# Altium PCB 上层（4层）.pcbdoc
Units mm, origin at the board's own origin, x right, y up, seen from the top; angles counter-clockwise.
Board outline 45.7 x 65.4 mm, 2 copper layers (Top Layer, Bottom Layer); 50 components, 65 nets, 244 pads, 114 vias.
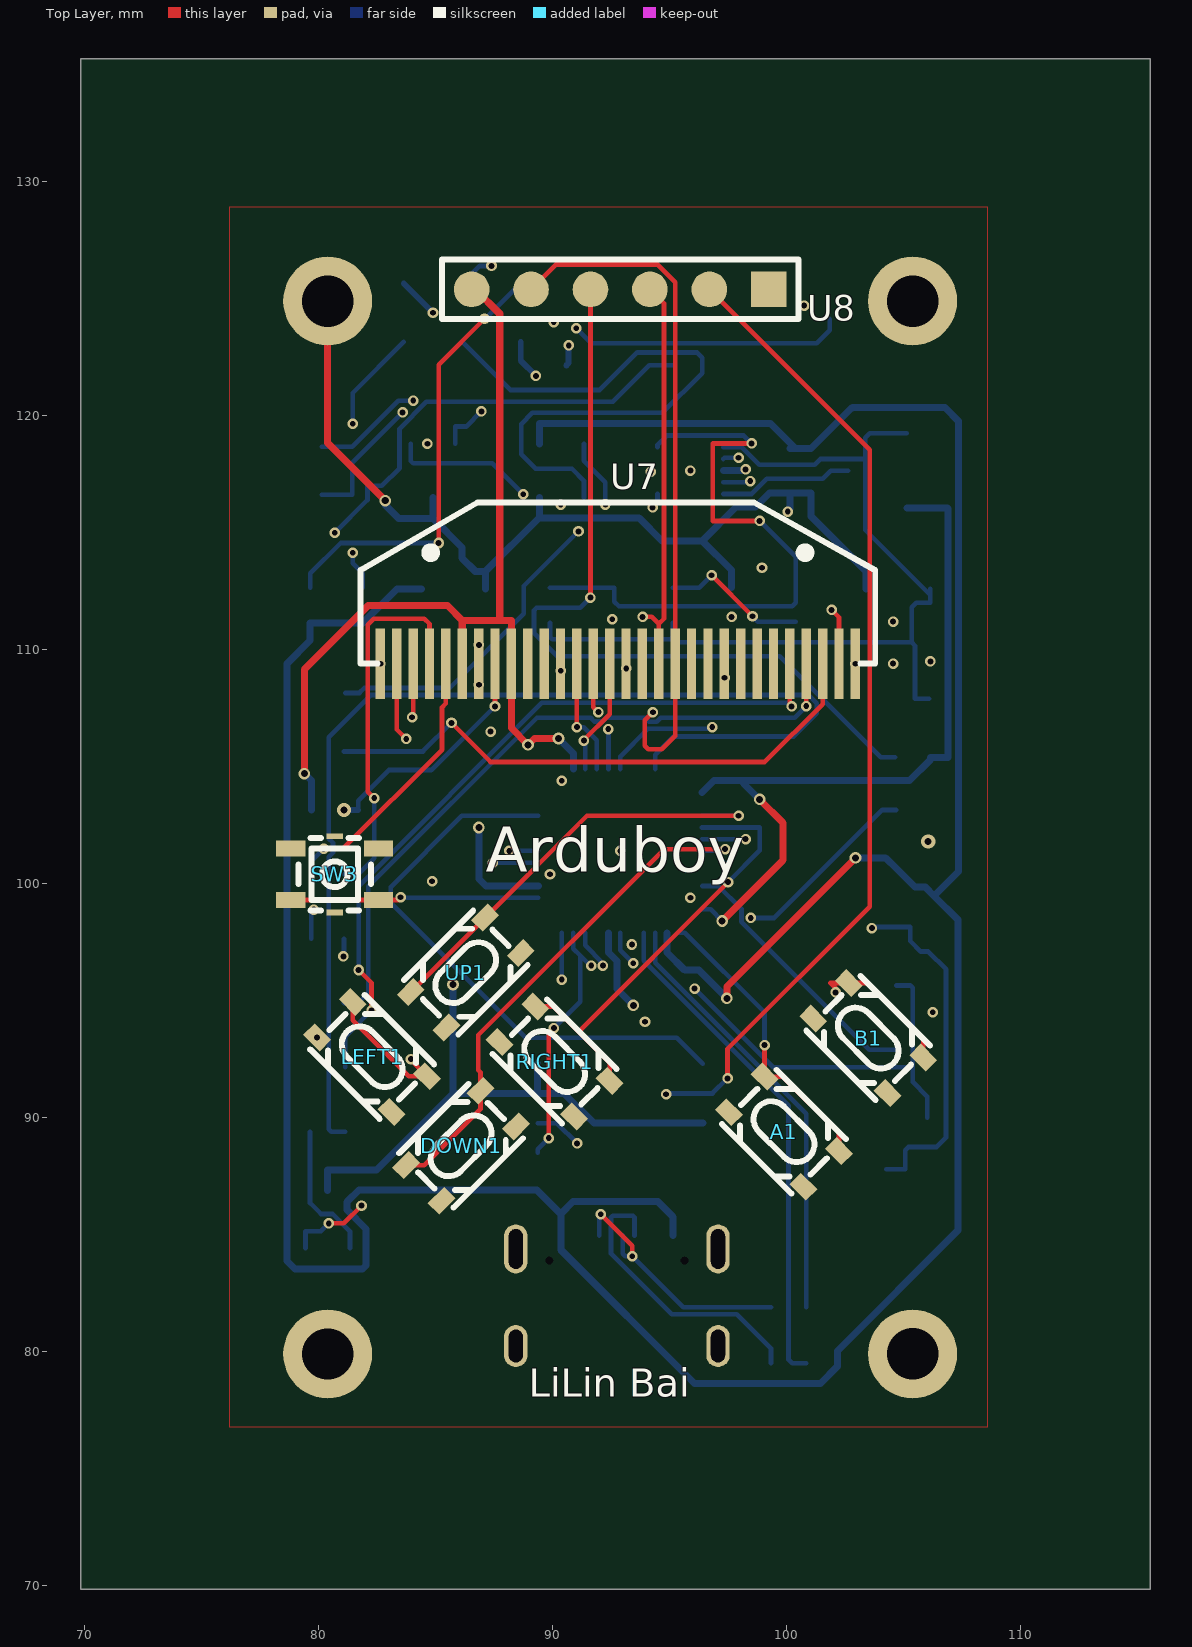
[diagram p0: Top Layer view]
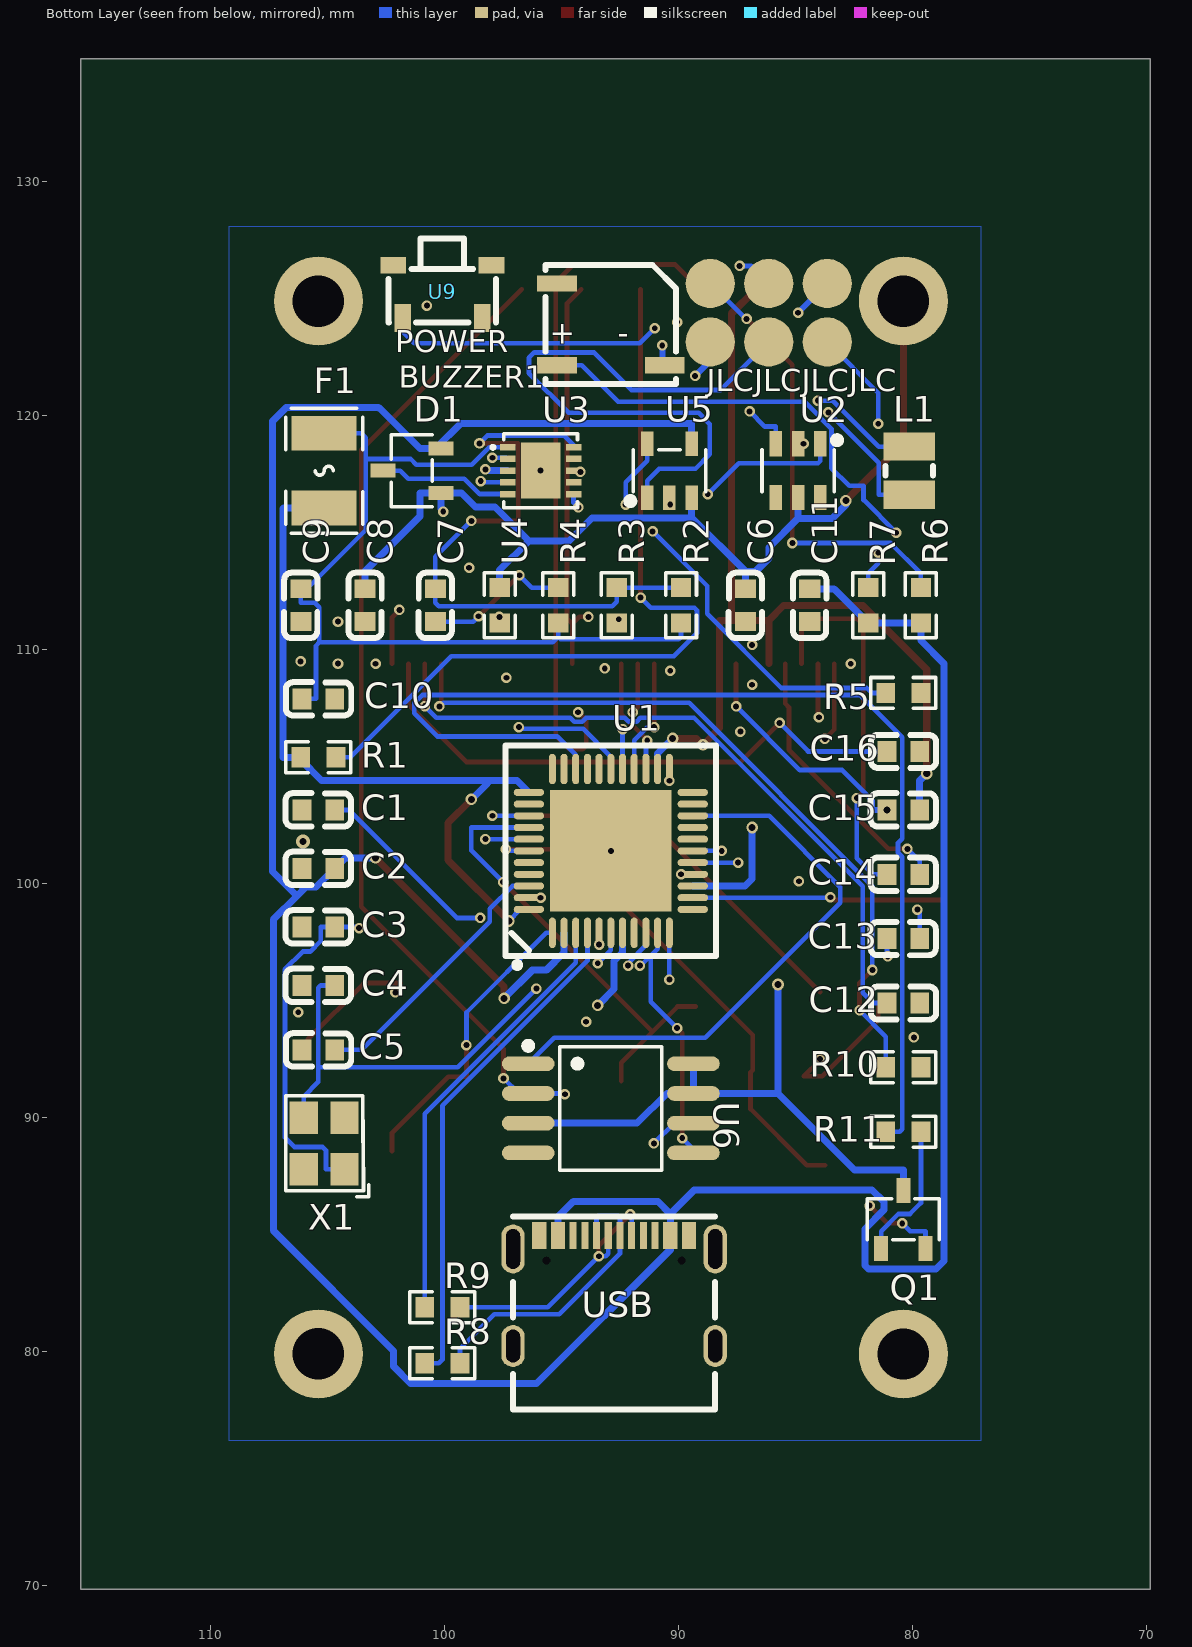
[diagram p1: Bottom Layer view, seen from below]

## Layer stack, top to bottom
Top Solder: solder mask 0.0102, Solder Resist, Dk 3.5
Top Layer: signal copper 0.0356
Dielectric 1: dielectric 0.32, FR-4, Dk 4.8
Bottom Layer: signal copper 0.0356
Bottom Solder: solder mask 0.0102, Solder Resist, Dk 3.5

## Board outline
115.55,69.85 69.85,69.85 69.85,135.25 115.55,135.25

## Components (designator, comment, footprint, x,y, rotation, side; value= is the part's Value field where it differs from the comment)
A1 "PTS815SJG250SMTRLFS" SW-SMD_4P-L4.2-W3.2-P2.15-LS4.6-1 99.9,89.4 r315 top
B1 "PTS815SJG250SMTRLFS" SW-SMD_4P-L4.2-W3.2-P2.15-LS4.6-1 103.5,93.4 r315 top
BUZZER1 "YS-SBZ5025C03R12" BUZ-SMD_L5.0-W5.5-P4.60 92.9,123.9 r180 bottom
C1 "1uF" C0603 105.4,103.15 r180 bottom
C2 "1uF" C0603 105.4,100.65 r180 bottom
C3 "22pF" C0603 105.4,98.15 r180 bottom
C4 "22pF" C0603 105.4,95.65 r180 bottom
C5 "0.1uF" C0603 105.4,92.9 r0 bottom
C6 "100nF" C0603 87.15,111.9 r90 bottom
C7 "68pF" C0603 100.4,111.9 r90 bottom
C8 "10uF" C0603 103.4,111.9 r90 bottom
C9 "22uF" C0603 106.15,111.9 r90 bottom
C10 "22uF" C0603 105.4,107.9 r0 bottom
C11 "1uF" C0603 84.4,111.9 r90 bottom
C12 "4.7uF" C0603 80.4,94.9 r0 bottom
C13 "1uF" C0603 80.4,97.65 r180 bottom
C14 "1uF" C0603 80.4,100.4 r180 bottom
C15 "2.2uF" C0603 80.4,103.15 r180 bottom
C16 "2.2uF" C0603 80.4,105.65 r0 bottom
D1 "BAT54C" SOT-23-3_L2.9-W1.6-P1.90-LS2.8-BR 101.4,117.65 r180 bottom
DOWN1 "PTS815SJG250SMTRLFS" SW-SMD_4P-L4.2-W3.2-P2.15-LS4.6-1 86.1,88.8 r45 top
F1 "ASMD1210-150" F1210 105.15,117.65 r270 bottom
L1 "3.3uH" IND-SMD_L2.5-W2.0 80.15,117.65 r270 bottom
LEFT1 "PTS815SJG250SMTRLFS" SW-SMD_4P-L4.2-W3.2-P2.15-LS4.6-1 82.3,92.6 r315 top
Q1 "MMSS8050-H-TP" SOT-23-3_L2.9-W1.6-P1.90-LS2.8-BR 80.4,85.65 r270 bottom
R1 "10K" R0603 105.4,105.4 r180 bottom
R2 "820kΩ" R0603 89.9,111.9 r90 bottom
R3 "143kΩ" R0603 92.65,111.9 r270 bottom
R4 "750K" R0603 95.15,111.9 r90 bottom
R5 "3kΩ" R0603 80.4,108.15 r0 bottom
R6 "3kΩ" R0603 79.65,111.9 r270 bottom
R7 "3kΩ" R0603 81.9,111.9 r270 bottom
R8 "22.6Ω" R0603 100.1,79.5 r180 bottom
R9 "22.6Ω" R0603 100.1,81.9 r180 bottom
R10 "910kΩ" R0603 80.4,92.15 r0 bottom
R11 "3.3kΩ" R0603 80.4,89.4 r180 bottom
RIGHT1 "PTS815SJG250SMTRLFS" SW-SMD_4P-L4.2-W3.2-P2.15-LS4.6-1 90.1,92.4 r315 top
SW3 "K2-1177SW-A4SW" KEY-SMD_K2-1177SW-A4DW-06 80.7,100.4 r0 top
U1 "ATMEGA32U4-MU" VQFN-44_L7.0-W7.0-P0.50-BL-EP5.2 92.9,101.4 r180 bottom
U2 "EC190707-14D8-17FE" SOT-23-6_L2.9-W1.6-P0.95-LS2.8-BL 84.9,117.65 r0 bottom
U3 "MP2155" TDFN-10_L3.0-W3.0-P0.50-TL-EP 95.9,117.65 r180 bottom
U4 "0R" R0603 97.65,111.9 r90 bottom
U5 "LTC4054ES5-4.2#TRPBF" TSOT-23-5_L2.9-W1.6-P0.95-LS2.8-BL 90.4,117.65 r180 bottom
U6 "W25Q128JVSIQ" SOIC-8_L5.3-W5.3-P1.27-LS8.0-BL 92.9,90.4 r270 bottom
U7 "0.96-OLED-30Pin_JX" SSD1306-30PIN_JX 82.65,109.4 r0 top
U8 "ISP 06" "ISP 06" 92.9,125.4 r0 top
U9 "SW-SMD_ST-1100LP" SW-SMD_ST-1100LP 100.1,125.3 r270 bottom
UP1 "PTS815SJG250SMTRLFS" SW-SMD_4P-L4.2-W3.2-P2.15-LS4.6-1 86.3,96.2 r45 top
USB "TYPE-C 16P(073)" USB-C-SMD_TYPE-C16PIN_C668624 92.76,82.602 r180 bottom
X1 "16MHz" OSC-SMD_4P-L3.2-W2.5-BL 105.15,88.9 r90 bottom

## Footprints (in the part's own frame and the unit in brackets; to place one, negate y for a bottom-side part, rotate by r counter-clockwise, add the part's x,y. Pads: shape width x height; smd on the part's side, far side on the other; paste and mask are expansions set on the pad)
BUZ-SMD_L5.0-W5.5-P4.60 [mm]
  rect 1.7x0.7 smd: 1(-2.3,-1.75) 2(2.3,-1.75) 3(-2.3,1.75)
  silkscreen extent -2.79,-2.54 2.79,2.54
C0603 [mm]
  rect 0.8x0.9 smd: 1(-0.7,0) 2(0.7,0)
  silkscreen extent -1.41,-0.71 1.39,0.72
F1210 [mm]
  rect 1.485x2.781 smd: 1(-1.6,0) 2(1.6,0)
  silkscreen extent -2.67,-1.65 2.67,1.65
IND-SMD_L2.5-W2.0 [mm]
  rect 1.2x2.2 smd: 1(1.028,0) 2(-1.028,0)
  silkscreen extent -0.2,-1.02 0.2,1.02
"ISP 06" [mil]
  round 60 smd: 1(-250,0.01) 2(-150,0.01) 3(-50,0.01) 4(50,0.01) 5(150,0.01)
  rect 60x60 smd: 6(250,0)
  silkscreen extent -300,-50 300,50
KEY-SMD_K2-1177SW-A4DW-06 [mm]
  rect 1.25x0.7 smd: 1(-1.875,1.101) 2(1.875,1.101) 3(-1.875,-1.1) 4(1.875,-1.1)
  rect 0.7x0.25 smd: 5(0,1.625) 6(0,-1.625)
  silkscreen extent -1.55,-1.55 1.55,1.55
OSC-SMD_4P-L3.2-W2.5-BL [mm]
  rect 1.4x1.2 smd: 1(-1.1,-0.875) 2(1.1,-0.875) 3(1.1,0.875) 4(-1.1,0.875)
  silkscreen extent -2.29,-1.9 2.03,1.65
R0603 [mm]
  rect 0.806x0.864 smd: 1(-0.753,0) 2(0.753,0)
  silkscreen extent -1.39,-0.66 1.39,0.66
SOIC-8_L5.3-W5.3-P1.27-LS8.0-BL [mm]
  oval 0.63x2.25 smd: 1(-1.905,-3.53) 2(-0.635,-3.53) 3(0.635,-3.53) 4(1.905,-3.53) 5(1.905,3.53) 6(0.635,3.53) 7(-0.635,3.53) 8(-1.905,3.53)
  silkscreen extent -2.82,-3.68 2.64,2.18
SOT-23-3_L2.9-W1.6-P1.90-LS2.8-BR [mm]
  rect 1.07x0.6 smd: 1(1.235,-0.95) 2(1.235,0.95) 3(-1.235,0)
  silkscreen extent -0.88,-1.54 0.88,1.54
SOT-23-6_L2.9-W1.6-P0.95-LS2.8-BL [mm]
  rect 0.532x1.072 smd: 1(-0.95,-1.149) 2(0,-1.149) 3(0.95,-1.149) 4(0.95,1.149) 5(0,1.149) 6(-0.95,1.149)
  silkscreen extent -1.82,-1.45 1.54,0.89
SSD1306-30PIN_JX [mm]
  rect 0.4x3 smd: 1(0,0) 2(0.7,0) 3(1.4,0) 4(2.1,0) 5(2.8,0) 6(3.5,0) 7(4.2,0) 8(4.9,0) 9(5.6,0) 10(6.3,0) 11(7,0) 12(7.7,0) 13(8.4,0) 14(9.1,0) 15(9.8,0) 16(10.5,0) 17(11.2,0) 18(11.9,0) 19(12.6,0) 20(13.3,0) 21(14,0) 22(14.7,0) 23(15.4,0) 24(16.1,0) 25(16.8,0) 26(17.5,0) 27(18.2,0) 28(18.9,0) 29(19.6,0) 30(20.3,0)
  silkscreen extent -0.85,0 21.15,6.89
SW-SMD_4P-L4.2-W3.2-P2.15-LS4.6-1 [mm]
  rect 1x0.7 smd: 1(-2.25,1.075) 2(2.25,1.075) 3(-2.25,-1.075) 4(2.25,-1.075)
  silkscreen extent -2.1,-1.65 2.1,1.65
SW-SMD_ST-1100LP [mm]
  rect 1.2x0.7 smd: 1(1.125,1.7) 2(1.125,-1.7)
  rect 0.7x1.1 smd: 3(-1.125,-2.1) 4(-1.125,2.1)
  silkscreen extent -2.28,-2.3 1.32,2.3
TDFN-10_L3.0-W3.0-P0.50-TL-EP [mm]
  rect 0.665x0.28 smd: 1(-1.408,1) 2(-1.408,0.5) 3(-1.408,0) 4(-1.408,-0.5) 5(-1.408,-1) 6(1.407,-1) 7(1.407,-0.5) 8(1.407,0) 9(1.407,0.5) 10(1.407,1)
  rect 1.7x2.4 smd: 11(0,0)
  silkscreen extent -2.12,-1.58 1.58,1.58
TSOT-23-5_L2.9-W1.6-P0.95-LS2.8-BL [mm]
  rect 0.532x1.045 smd: 1(-0.95,-1.148) 2(0,-1.148) 3(0.95,-1.148) 4(0.95,1.147) 5(-0.95,1.147)
  silkscreen extent -1.82,-1.45 1.55,0.9
USB-C-SMD_TYPE-C16PIN_C668624 [mm]
  oval 1x2.1 hole 0.6 slot 1.7 at 90 deg: 1(-4.32,1.787) 2(4.32,1.787)
  oval 1x1.8 hole 0.6 slot 1.4 at 90 deg: 3(-4.32,-2.363) 4(4.32,-2.363)
  rect 0.6x1.15 smd: A1B12(-3.2,2.362) A4B9(-2.4,2.362) B1A12(3.2,2.362) B4A9(2.4,2.362)
  rect 0.3x1.15 smd: A5(-1.25,2.362) A6(-0.25,2.362) A7(0.25,2.362) A8(1.25,2.362) B5(1.75,2.362) B6(0.75,2.362) B7(-0.75,2.362) B8(-1.75,2.362)
  Multi-Layer board cut-out: 2.727,1.287 2.743,1.358 2.788,1.414 2.854,1.446 2.926,1.446 2.991,1.414 3.036,1.358 3.052,1.287 3.052,1.287 3.036,1.217 2.991,1.16 2.926,1.129 2.854,1.129 2.788,1.16 2.743,1.217 2.727,1.287
  Multi-Layer board cut-out: -3.053,1.287 -3.037,1.358 -2.992,1.414 -2.926,1.446 -2.854,1.446 -2.789,1.414 -2.744,1.358 -2.728,1.287 -2.728,1.287 -2.744,1.217 -2.789,1.16 -2.854,1.129 -2.926,1.129 -2.992,1.16 -3.037,1.217 -3.053,1.287
  silkscreen extent -4.32,-5.08 4.32,3.17
VQFN-44_L7.0-W7.0-P0.50-BL-EP5.2 [mm]
  oval 0.3x1.3 smd: 1(-2.5,-3.5) 2(-2,-3.5) 3(-1.5,-3.5) 4(-1,-3.5) 5(-0.5,-3.5) 6(0,-3.5) 7(0.5,-3.5) 8(1,-3.5) 9(1.5,-3.5) 10(2,-3.5) 11(2.5,-3.5) 23(2.5,3.5) 24(2,3.5) 25(1.5,3.5) 26(1,3.5) 27(0.5,3.5) 28(0,3.5) 29(-0.5,3.5) 30(-1,3.5) 31(-1.5,3.5) 32(-2,3.5) 33(-2.5,3.5)
  oval 1.3x0.3 smd: 12(3.5,-2.5) 13(3.5,-2) 14(3.5,-1.5) 15(3.5,-1) 16(3.5,-0.5) 17(3.5,0) 18(3.5,0.5) 19(3.5,1) 20(3.5,1.5) 21(3.5,2) 22(3.5,2.5) 34(-3.5,2.5) 35(-3.5,2) 36(-3.5,1.5) 37(-3.5,1) 38(-3.5,0.5) 39(-3.5,0) 40(-3.5,-0.5) 41(-3.5,-1) 42(-3.5,-1.5) 43(-3.5,-2) 44(-3.5,-2.5)
  rect 5.2x5.2 smd: 45(0,0)
  silkscreen extent -4.5,-5 4.5,4.5

## Free pads (board coordinates)
  round 3.8 hole 2.2 copper offset -0.001,0: 1(80.401,79.9) 1(80.401,124.9) 1(105.401,79.9) 1(105.401,124.9)
  round 2.1 smd far side: 3(83.65,123.15) 3(83.65,125.65) 3(86.15,123.15) 3(86.15,125.65) 3(88.65,123.15) 3(88.65,125.65)

## Via types
v1: diameter 0.45, hole 0.25, Top Layer to Bottom Layer, 101 vias
v2: diameter 0.5, hole 0.3, Top Layer to Bottom Layer, 11 vias
v3: diameter 0.61, hole 0.305, Top Layer to Bottom Layer, 2 vias

## Nets (pads, with @x,y where several pads share a name; then routed paths per layer and width w, separated by ;. In a path a pad name is that pad's centre, name@x,y a point inside that pad or via, vN(x,y) a via of type N, cw(c..) or ccw(c..) an arc to the next point about the centre after c; other vN are vias at no path point)
BEEP: R11.1 U1.31 | length 48.1
  Bottom Layer w0.2: R11.1 80.549,89.4 80.45,89.5 80.45,101.143 80.626,101.319 80.626,101.74 80.45,101.916 80.45,106.264 82.246,108.06 100.955,108.06 101.304,107.711 101.304,107.284 100.312,106.291 95.187,106.291 94.4,105.504 U1.31
BEEP-: BUZZER1.2 pad.3@83.65,125.65 | length 9
  Mid-Layer 2 w0.254: v1(84.9,124.4) 86.3,123 v1(90.7,123)
  Bottom Layer w0.254: pad.3@83.65,125.65 v1(84.9,124.4) ; BUZZER1.2 90.7,122.25 v1(90.7,123)
BUZZER1_1: BUZZER1.1 Q1.2 | length 52.5
  Top Layer w0.2: v1(80.443,85.481) 81.083,85.481 v1(81.845,86.243)
  Mid-Layer 2 w0.254: v1(80.7,115) 80.7,104.5 82.9,102.3 82.9,87.298 v1(81.845,86.243)
  Bottom Layer w0.2: Q1.2 79.45,85.151 80.112,85.151 v1(80.443,85.481) ; v1(80.7,115) 82.1,116.4 82.1,117 82.709,117 83.471,117.762 83.471,119.442 84.621,120.591 92.591,120.591 94.149,122.15 BUZZER1.1
BUZZER1_3: BUZZER1.3
GND: A1.3 A1.4 B1.3 B1.4 C1.1 C2.1 C3.1 C4.1 C5.2 C6.1 C8.1 C9.1 C10.1 C11.1 C12.1 C16.1 DOWN1.3 DOWN1.4 LEFT1.3 LEFT1.4 pad.1@105.401,79.9 R3.2 R5.1 R10.1 RIGHT1.3 RIGHT1.4 SW3.1 SW3.2 U1.5 U1.15 U1.23 U1.33 U1.35 U1.43 U1.45 U2.2 U3.8 U3.9 U3.11 U4.1 U5.2 U6.4 U7.1 U7.7 U7.10 U7.11 U7.12 U7.16 U7.17 U7.21 U7.22 U7.23 U7.24 U7.25 U7.30 U8.6 U9.1 UP1.3 UP1.4 USB.1 USB.2 USB.3 USB.4 USB.A1B12 USB.B1A12
  other v1: 79.949,93.431 93.96,94.102 106.26,94.502 93.4,97.4 95.9,99.4 84.86,100.102 89.9,100.4 92.9,101.4 90.4,104.4 87.36,106.502 86.86,108.502 97.36,108.802 90.36,109.102 93.16,109.202 82.65,109.4 102.95,109.4 104.56,109.402 106.16,109.502 86.86,110.202 104.56,111.202 92.56,111.302 97.66,111.402 98.96,113.502 90.36,116.202 94.2,117.6 95.9,117.65 84.66,118.802 90.06,124.002 100.76,124.702
  other v3: 106.06,101.802 81.1,103.15
KEYA: A1.1 A1.2 U1.1 | length 12.8
  Top Layer w0.2: v1(99.069,93.101) 99.069,91.751 99.167,91.751 99.848,91.751 102.251,89.348 A1.2
  Bottom Layer w0.2: U1.1@95.401,97.9 95.663,97.9 99.069,94.494 v1(99.069,93.101)
KEYB: B1.1 B1.2 U1.28 | length 24.7
  Top Layer w0.2: v1(102.108,95.356) 102.108,95.534 101.89,95.751 103.448,95.751 105.851,93.348 B1.2
  Mid-Layer 1 w0.2: v1(96.831,106.693) 102.107,101.417 v1(102.108,95.356)
  Bottom Layer w0.2: U1.28 92.9,105.433 94.087,106.62 96.758,106.62 v1(96.831,106.693)
KEYDOWN: DOWN1.1 DOWN1.2 U1.39 | length 22.2
  Top Layer w0.2: DOWN1.1 84.527,87.969 86.931,90.373 DOWN1.2 86.931,91.93 86.835,92.026 86.835,93.532 94.779,101.476 v1(97.382,101.476)
  Bottom Layer w0.2: U1.39 97.307,101.4 v1(97.382,101.476)
KEYLEFT: LEFT1.1 LEFT1.2 U1.38 | length 45
  Top Layer w0.2: LEFT1.1 81.469,94.172 83.872,91.769 84.262,91.769 LEFT1.2 83.96,92.46 v1(83.96,92.502)
  Mid-Layer 2 w0.2: v1(83.96,92.502) 89.36,87.102 95.56,87.102 104.96,96.502 104.96,98.302 101.36,101.902 v1(98.26,101.902)
  Bottom Layer w0.2: U1.38 v1(98.26,101.902)
KEYPOWER: pad.3@86.15,125.65 U2.3 U9.2 | length 26.7
  Mid-Layer 1 w0.2: v1(86.97,120.183) 87.4,120.614 v1(87.4,126.4) 88.36,126.4 v1(91.024,123.736)
  Bottom Layer w0.2: U2.3 85.85,119.536 86.322,119.536 v1(86.97,120.183) ; pad.3@86.15,125.65 86.9,126.4 v1(87.4,126.4) ; v1(91.024,123.736) 91.66,123.1 101.3,123.1 101.85,123.65 101.85,124.125 U9.2
KEYRESET: R1.2 SW3.3 SW3.4 U1.13 U8.3 | length 61.2
  Top Layer w0.2: SW3.3 79.651,99.3 81.749,99.3 SW3.4 83.4,99.3 v1(83.518,99.418) ; v1(91.63,112.227) U8.3
  Mid-Layer 1 w0.2: v1(83.518,99.418) 83.518,104.115 v1(91.63,112.227)
  Bottom Layer w0.2: v1(83.518,99.418) 83.536,99.4 U1.13 ; v1(91.63,112.227) 91.196,111.793 89.324,111.793 89.219,111.688 89.219,110.705 90.202,109.723 99.72,109.723 104.043,105.4 R1.2
KEYRIGHT: RIGHT1.1 RIGHT1.2 U1.37 | length 19.3
  Top Layer w0.2: RIGHT1.1 90.048,94.751 91.12,93.679 ; RIGHT1.2 92.451,92.348 91.12,93.679 ; v1(97.507,100.065) 91.12,93.679
  Bottom Layer w0.2: U1.37 98.861,102.401 98.861,101.42 v1@97.507,100.066
KEYUP: U1.36 UP1.1 UP1.2 | length 18.7
  Top Layer w0.2: UP1.1 UP1.2 91.482,102.902 v1(97.96,102.902)
  Bottom Layer w0.2: U1.36 97.08,102.9 97.082,102.902 v1(97.96,102.902)
LEDB+: pad.3@88.65,123.15 U2.1 U3.6 | length 19.6
  Mid-Layer 1 w0.2: v1(88.756,116.642) 93.722,116.642 v1(94.287,116.077)
  Mid-Layer 2 w0.254: v1(88.756,116.642) 89.3,117.186 v1(89.3,121.7)
  Bottom Layer w0.2: U2.1 83.95,118.062 84.05,117.962 87.436,117.962 v1(88.756,116.642) ; v1(94.287,116.077) 94.492,116.283 U3.6
  Bottom Layer w0.254: pad.3@88.65,123.15 88.65,122.35 v1(89.3,121.7)
LEDG+: pad.3@88.65,125.65 R6.1 | length 19.2
  Top Layer w0.2: v1(85.142,114.559) 85.142,122.179 v1(87.101,124.138)
  Bottom Layer w0.2: R6.1 79.65,113.257 80.952,114.559 v1(85.142,114.559) ; v1(87.101,124.138) 87.138,124.138 pad.3@88.65,125.65
LEDG-: pad.3@86.15,123.15 U5.1 | length 26.3
  Bottom Layer w0.2: pad.3@86.15,123.15 88.2,121.1 92.02,121.1 93.622,122.702 96.179,122.702 96.401,122.481 96.401,121.817 94.706,120.122 89.15,120.122 88.67,119.642 88.67,118.348 89.282,117.736 90.84,117.736 91.35,117.226 U5.1
LEDR-: pad.3@83.65,123.15 R7.1 | length 11.6
  Mid-Layer 1 w0.2: v1(81.47,114.142) v1(81.47,119.654)
  Bottom Layer w0.2: v1(81.47,114.142) 81.47,113.687 81.9,113.257 R7.1 ; v1(81.47,119.654) 81.47,120.97 pad.3@83.65,123.15
MISO: U1.11 U6.2 U8.5 | length 50.7
  Top Layer w0.2: U8.5 103.56,118.55 103.56,99.01 97.487,92.937 v1(97.487,91.679)
  Mid-Layer 1 w0.2: v1(90.4,95.902) 90.4,95.462 v1(94.86,91.002)
  Bottom Layer w0.2: v1(90.4,95.902) U1.11 ; v1@94.86,91.001 94.893,91.034 U6.2@96.43,91.034 ; U6.2 96.843,91.035 v1(97.487,91.679)
MOSI: U1.10 U6.5 U7.19 U8.2 | length 52.3
  Top Layer w0.2: U8.2 90.149,126.459 94.498,126.459 95.25,125.707 95.25,111.101 95.25,110.25 U7.19 95.25,106.313 94.675,105.738 94.1,105.738 93.949,105.889 93.949,106.976 v1(94.297,107.324) ; v1(89.846,89.129) 89.846,93.606 v1(90.069,93.829)
  Mid-Layer 1 w0.2: v1(91.66,96.502) 91.66,96.602 94.296,99.238 v1(94.297,107.324)
  Bottom Layer w0.2: U6.5 89.37,88.653 v1(89.846,89.129) ; v1(90.069,93.829) 91.198,94.958 91.198,96.93 ; U1.10 90.9,97.228 91.198,96.93 ; v1(91.66,96.502) 91.626,96.502 91.198,96.93
OLEDCS: U1.26 U7.13 | length 5
  Top Layer w0.2: v1(91.05,106.688) U7.13
  Bottom Layer w0.2: v1(91.05,106.688) 91.339,106.688 91.9,106.127 U1.26
OLEDD/C: U1.25 U7.15 | length 5
  Top Layer w0.2: v1(91.346,106.113) 91.346,106.14 92.45,107.244 U7.15
  Bottom Layer w0.2: v1(91.346,106.113) 91.4,106.059 U1.25
OLEDRES: U1.27 U7.14 | length 4.8
  Top Layer w0.2: U7.14 91.75,107.548 v1(91.968,107.33)
  Mid-Layer 1 w0.2: v1(91.968,107.33) 91.968,107.024 v1(92.388,106.604)
  Bottom Layer w0.2: v1(92.388,106.604) 92.4,106.592 U1.27
R4_2: C7.1 R4.2 | length 6.3
  Top Layer w0.2: v1(96.805,113.18) v1(98.555,111.43)
  Bottom Layer w0.2: R4.2 96.278,112.653 v1(96.805,113.18) ; v1(98.555,111.43) 98.785,111.2 C7.1
R8_2: R8.2 USB.A7 USB.B7 | length 12.5
  Bottom Layer w0.2: USB.B7 93.51,85.353 93.51,85.74 93.443,85.807 92.577,85.807 92.51,85.74 92.51,85.353 USB.A7 92.51,84.189 95.102,81.598 97.882,81.598 99.347,80.133 R8.2
R9_2: R9.2 USB.A6 USB.B6 | length 11.3
  Top Layer w0.2: v1(92.069,85.87) 93.413,84.526 v1(93.413,84.077)
  Bottom Layer w0.2: USB.B6 92.01,85.811 v1(92.069,85.87) ; USB.A6 93.01,84.189 93.122,84.077 v1(93.413,84.077) 95.59,81.9 R9.2
R11_2: Q1.1 R11.2 | length 6
  Bottom Layer w0.2: R11.2 79.647,86.353 80.117,85.883 80.617,85.883 81.35,85.151 Q1.1
RX: U1.20 U6.1 | length 24.4
  Bottom Layer w0.2: U1.20 86.133,102.9 83.089,99.856 83.089,99.193 88.861,93.421 95.314,93.421 U6.1
SCK: U1.9 U6.6 U7.18 U8.4 | length 59.8
  Top Layer w0.2: v1(93.86,111.402) 94.248,111.402 94.55,111.1 ; U8.4 94.771,124.799 94.771,111.322 94.55,111.101 94.55,110.25 U7.18
  Mid-Layer 2 w0.2: v1(91.06,88.902) 92.16,90.002 v1(92.16,96.502) 92.16,98.103 87.86,98.103 86.161,99.802 86.161,113.003 93.86,113.003 v1(93.86,111.402)
  Bottom Layer w0.2: U6.6 90.197,89.765 v1(91.06,88.902) ; U1.9 91.4,97.362 92.16,96.602 v1(92.16,96.502)
SW2_3: U9.3
SW2_4: U9.4
SW3_5: SW3.5
SW3_6: SW3.6
U1_6: C1.2 U1.6 | length 15.5
  Mid-Layer 1 w0.2: v1(93.46,96.602) 96.55,96.602 v1(98.482,98.534)
  Bottom Layer w0.2: U1.6 92.9,97.162 v1(93.46,96.602) ; v1(98.482,98.534) 99.484,98.534 104.099,103.15 C1.2
U1_16: C3.2 U1.16 X1.1 | length 34.4
  Mid-Layer 2 w0.2: v1(87.46,100.902) 100.86,100.902 v1(103.66,98.102)
  Bottom Layer w0.2: v1@87.461,100.902 U1.16 ; v1(103.66,98.102) 103.707,98.149 C3.2@104.7,98.149 ; X1.1 104.665,87.8 105.076,87.8 105.076,88.601 105.225,88.75 106.421,88.75 106.827,89.156 106.827,96.343 106.07,97.1 105.75,97.1 105.301,97.549 105.301,98.15 105,98.15 C3.2
U1_17: C4.2 U1.17 X1.3 | length 30
  Mid-Layer 1 w0.2: v1(88.16,101.402) 88.16,99.402 92.049,95.514 v1(96.081,95.514)
  Bottom Layer w0.2: v1(88.16,101.402) 88.809,101.402 88.811,101.4 U1.17 ; v1(96.081,95.514) 99.441,92.154 105.399,92.154 ; C4.2 105,95.65 105.301,95.65 105.399,95.551 105.399,92.154 ; X1.3 106.025,90.901 105.399,91.527 105.399,92.154
U1_42: C5.1 U1.42 | length 11.5
  Bottom Layer w0.2: U1.42 97.099,99.9 98.08,98.919 98.08,98.368 103.548,92.9 104.099,92.9 C5.1
U2_4: U2.4
U2_6: U2.6
U3_1: C9.2 C10.2 F1.1 R2.1 R4.1 U3.1 | length 39.1
  Bottom Layer w0.2: R2.1 89.9,110.543 90,110.443 95.05,110.443 95.15,110.543 ; R4.1 95.15,110.543 ; U3.1@97.306,118.649 98.096,118.649 98.843,117.902 101.213,117.902 101.462,118.151 103.372,118.151 ; F1.1 103.559,119.25 103.372,119.063 103.372,118.152 103.372,115.114 C9.2@106.15,112.336 ; C10.2 105.499,107.9 105.499,110.174 105.363,110.311 ; C9.2 C9.2@106.15,112.336 ; 95.15,110.543 95.382,110.311 105.363,110.311 ; 105.363,110.311 105.363,111.813 105.549,111.999 106.15,111.999 106.15,112.3 C9.2@106.15,112.336
U3_2: L1.2 U3.2 | length 20.3
  Mid-Layer 1 w0.2: v1(84.059,120.644) 86.5,118.202 v1(97.96,118.202)
  Bottom Layer w0.2: L1.2 81.451,118.678 83.416,120.644 v1(84.059,120.644) ; U3.2 97.36,118.202 v1(97.96,118.202)
U3_4: L1.1 U3.4 | length 24.3
  Mid-Layer 1 w0.2: v1@83.6,120.14 83.6,117.862 84.261,117.201 v1@98.459,117.201
  Bottom Layer w0.2: L1.1 81.451,116.622 81.451,117.991 v1(83.6,120.141) ; U3.4 98.408,117.15 v1(98.46,117.202)
U3_5: D1.3 U3.5 | length 5.7
  Bottom Layer w0.2: U3.5 98.508,116.65 99.16,117.303 101.551,117.303 101.899,117.651 ; 101.899,117.65 D1.3
U3_10: C7.2 R2.2 R3.1 U3.10 | length 26.8
  Top Layer w0.2: v1@98.513,118.812 96.859,118.812 96.859,115.502 v1@98.861,115.502
  Bottom Layer w0.2: R2.2 R3.1 92.65,112.049 92.849,111.851 100.251,111.851 100.4,111.999 C7.2 100.4,113.962 v1(98.86,115.502) ; U3.10 94.492,118.743 94.9,119.151 98.175,119.151 v1(98.513,118.812)
U5_5: R5.2 U5.5 | length 18.1
  Mid-Layer 1 w0.2: v1(91.118,115.055) v1(92.268,116.204)
  Bottom Layer w0.2: R5.2 81.757,108.15 81.97,108.362 85.613,108.362 88.784,111.533 88.784,112.721 v1(91.118,115.055) ; U5.5@91.35,118.798 91.35,118.075 92.267,117.157 v1(92.268,116.204)
U7_2: C13.1 U7.2 | length 14.6
  Top Layer w0.2: U7.2 83.35,106.589 v1(83.754,106.186)
  Mid-Layer 1 w0.2: v1(81.068,96.889) 81.068,103.5 v1(83.754,106.186)
  Bottom Layer w0.2: v1(81.068,96.889) 81.1,96.921 C13.1
U7_3: C13.2 U7.3 | length 13.6
  Top Layer w0.2: v1(84.008,107.111) 84.05,107.153 U7.3
  Mid-Layer 1 w0.2: v1(79.801,98.89) 79.801,102.904 v1(84.008,107.111)
  Bottom Layer w0.2: C13.2 79.7,98.789 v1(79.801,98.89)
U7_4: C14.1 U7.4 | length 16.2
  Top Layer w0.2: v1(82.387,103.655) 82.112,103.93 82.112,111.067 82.368,111.323 84.528,111.323 84.75,111.101 U7.4
  Bottom Layer w0.2: C14.1 81.701,100.4 82.387,101.086 v1(82.387,103.655)
U7_5: C14.2 U7.5 | length 11.9
  Top Layer w0.2: v1(80.224,101.486) 81.044,101.486 85.288,105.73 85.288,107.538 85.45,107.699 U7.5
  Bottom Layer w0.2: C14.2 79.7,101.051 79.789,101.051 v1(80.224,101.486)
U7_20: U7.20
U7_26: R10.2 U7.26 | length 32.1
  Top Layer w0.2: v1(81.722,96.311) 82.272,95.761 v1(82.272,94.581) ; U7.26 100.15,107.699 100.225,107.624 v1(100.225,107.575)
  Bottom Layer w0.2: R10.2@81.153,92.15 81.153,93.462 v1(82.272,94.581) ; v1(81.722,96.311) 81.722,99.899 89.555,107.732 100.068,107.732 v1(100.225,107.575)
U7_27: C12.2 U7.27 | length 29.8
  Top Layer w0.2: v1(100.85,107.59) 100.85,107.699 U7.27
  Bottom Layer w0.2: C12.2 81.701,94.9 82.138,95.338 82.138,99.887 89.345,107.095 91.635,107.095 91.802,106.928 92.134,106.928 92.301,107.095 93.958,107.095 94.131,106.922 94.464,106.922 94.636,107.095 100.354,107.095 v1(100.85,107.59)
U7_28: C16.2 U7.28 | length 24.4
  Top Layer w0.2: v1@85.691,106.871 87.357,105.202 99.077,105.202 101.551,107.674 U7.28@101.551,109.401
  Bottom Layer w0.2: C16.2@81.1,105.65 84.47,105.65 v1(85.69,106.87)
U7_29: C15.1 U7.8 U7.29 | length 28.9
  Top Layer w0.2: v1(87.55,107.578) U7.8 ; v1(101.933,111.702) 102.25,111.385 U7.29
  Mid-Layer 1 w0.2: v1(87.55,107.578) 87.704,107.732 97.963,107.732 v1(101.933,111.702)
  Bottom Layer w0.2: 81.701,103.15 81.701,103.548 83.007,104.854 84.826,104.854 v1(87.55,107.578)
  Bottom Layer w0.254: C15.1 81.701,103.15
USB1_A5: USB.A5
USB1_A8: USB.A8
USB1_B5: USB.B5
USB1_B8: USB.B8
USBD+: R8.1 U1.4 | length 21.6
  Bottom Layer w0.2: U1.4 93.9,96.7 100.096,90.504 100.096,79.653 100.249,79.5 R8.1
USBD-: R9.1 U1.3 | length 18.7
  Bottom Layer w0.2: U1.3 94.4,96.627 100.853,90.174 R9.1
VBUS: C2.2 C11.2 D1.2 R6.2 R7.2 U1.2 U1.7 U5.4 USB.A4B9 USB.B4A9 | length 159.5
  Top Layer w0.3: v2(97.46,95.102) 97.46,95.602 v2(102.96,101.102)
  Mid-Layer 2 w0.3: v2(93.461,94.801) 97.159,94.801 v2(97.46,95.102)
  Bottom Layer w0.3: C11.2 83.353,112.6 R7.2 R6.2 79.65,110.393 78.655,109.398 78.655,83.879 79.005,83.529 81.884,83.529 82.044,83.69 82.044,85.24 81.22,86.064 81.22,86.404 81.731,86.915 89.335,86.915 90.36,85.89 ; U5.4@89.45,118.798 89.45,118.801 89.45,119.671 99.316,119.671 D1.2@100.386,118.6 ; U1.7 92.399,97.062 92.76,96.701 92.76,95.502 v2(93.461,94.801) ; U1.2 94.9,97.062 95.66,96.302 96.26,96.302 v2(97.46,95.102) ; USB.A4B9 95.16,85.765 94.505,86.42 90.89,86.42 90.36,85.89 ; D1.2 D1.2@100.386,118.6 ; v2@102.96,101.103 104.248,101.103 104.7,100.651 105.501,99.849 105.945,99.849 106.316,99.479 ; 90.36,85.89 USB.B4A9 90.36,84.355 96.073,78.642 101.456,78.642 102.189,79.375 102.189,80.032 107.326,85.17 107.326,98.468 106.316,99.479 ; D1.2@100.386,118.6 101.05,118.6 102.787,120.336 102.83,120.336 102.837,120.343 106.774,120.343 107.355,119.763 107.355,100.517 106.316,99.479
VCC: C15.2 F1.2 Q1.3 R1.1 U1.14 U1.24 U1.34 U1.44 U6.3 U6.7 U6.8 U7.6 U7.9 U8.1 | length 132.9
  Top Layer w0.3: v2(79.399,104.703) 79.399,109.152 82.132,111.885 85.516,111.885 86.15,111.251 ; U7.6 86.15,110.325 86.15,111.251 ; U8.1 86.709,125.4 87.753,124.356 87.753,111.251 ; v2(90.26,106.202) 89.231,106.202 v2(88.963,105.934) 88.25,106.647 U7.9 88.25,110.325 88.25,111.251 87.753,111.251 ; v2(97.26,98.402) 99.86,101.002 99.86,102.602 v2(98.86,103.602) ; 86.15,111.251 87.753,111.251
  Mid-Layer 1 w0.3: v2(85.753,95.687) 85.753,102.724 v2(88.963,105.934)
  Mid-Layer 2 w0.3: v2(86.86,102.402) 92.259,102.403 93.461,103.602 v2@98.861,103.602 ; v2(86.86,102.402) 86.86,102.802 v2(90.26,106.202)
  Bottom Layer w0.2: U1.44 96.763,98.901 v2@97.261,98.403
  Bottom Layer w0.3: v2(79.399,104.703) 79.7,104.402 C15.2 ; Q1.3@80.4,86.885 80.4,87.771 82.488,87.771 85.753,91.035 ; v2(85.753,95.687) 85.753,91.035 ; v2(86.86,102.402) 86.86,100.202 87.162,99.9 U1.14 ; U6.8 U6.7 ; v2(90.26,106.202) 90.9,105.562 U1.24 ; U1.34@96.4,103.899 96.903,104.402 105.259,104.402 106.153,105.296 R1.1 106.902,105.4 106.902,116.039 106.891,116.05 F1.2 ; U6.3 91.775,89.765 90.505,91.035 U6.7 ; 98.06,104.402 98.261,104.202 v2@98.861,103.602 ; 85.753,91.035 U6.7
VDD: C6.2 C8.2 D1.1 pad.1@80.401,124.9 U2.5 U3.3 U4.2 U5.3 | length 47.4
  Top Layer w0.3: pad.1@80.4,124.9 80.4,118.829 v2(82.859,116.37)
  Mid-Layer 2 w0.3: v1(98.26,117.702) 98.56,118.002 99.16,118.002 99.26,117.902 99.26,116.102 99.56,115.802 99.96,115.802 v1(100.06,115.902)
  Bottom Layer w0.3: v2(82.859,116.37) 82.859,116.176 83.421,115.614 84.9,115.614 ; U2.5@84.9,116.501 84.9,116.449 84.9,115.905 84.9,115.614 ; C6.2 87.15,113.351 ; U5.3@89.45,116.503 89.45,115.755 89.45,115.63 ; 96.405,114.651 97.855,116.101 98.681,116.101 99.28,116.701 D1.1 ; U3.3 98.208,117.65 v1(98.26,117.702) ; U4.2 97.65,113.407 96.405,114.652 94.69,114.652 93.712,115.63 89.45,115.63 ; v1(100.06,115.902) 100.165,116.007 D1.1 ; C8.2 103.4,113.351 101.05,115.7 101.05,116.7 100.608,116.7 D1.1 ; 84.9,115.614 86.146,114.368 86.146,113.909 86.705,113.351 87.15,113.351 ; 87.15,113.351 89.429,115.63 89.45,115.63
X1_2: X1.2
X1_4: X1.4
"": 
pads on no net: U1.8 U1.12 U1.18 U1.19 U1.21 U1.22 U1.29 U1.30 U1.32 U1.40 U1.41 U3.7

## Polygon pours and split planes (outlines as drawn)
GND on Top Layer (solid): 76.2,76.8 108.6,76.8 108.6,128.9 76.2,128.9
GND on Mid-Layer 2 (solid, pour order 1): 76.5,76.6 108.8,76.6 108.8,128.6 76.5,128.6
GND on Mid-Layer 1 (solid, pour order 2): 76.8,76.4 109,76.4 109,128.3 76.8,128.3
GND on Bottom Layer (solid, pour order 3): 77.1,76.2 109.2,76.2 109.2,128.1 77.1,128.1

## Silkscreen, mask and mechanical layers (free items; w line width, h text height)
Top Overlay:
  text "Arduboy" at 87.157,100.508 h1.91
  text "LiLin Bai" at 88.982,78.067 h1.2
Bottom Overlay:
  text "POWER" at 102.117,122.704 h0.96
  text "JLCJLCJLCJLC" at 88.809,121.054 h0.96
Mechanical 1:
  lines w0.254: 77.9,79.4 ccw(c79.9,79.4) 79.9,77.4 105.9,77.4 ccw(c105.9,79.4) 107.9,79.4 107.9,125.4 ccw(c105.9,125.4) 105.9,127.4 79.9,127.4 ccw(c79.9,125.4) 77.9,125.4 77.9,79.4

## Text inside footprints (layer, text, board x,y; h text height)
BUZZER1: Bottom Overlay "+" at 94.424,123.083 h0.95; Bottom Overlay "-" at 92.138,123.083 h0.95